# EAGLE board chassis (EAGLE 7.3.0)
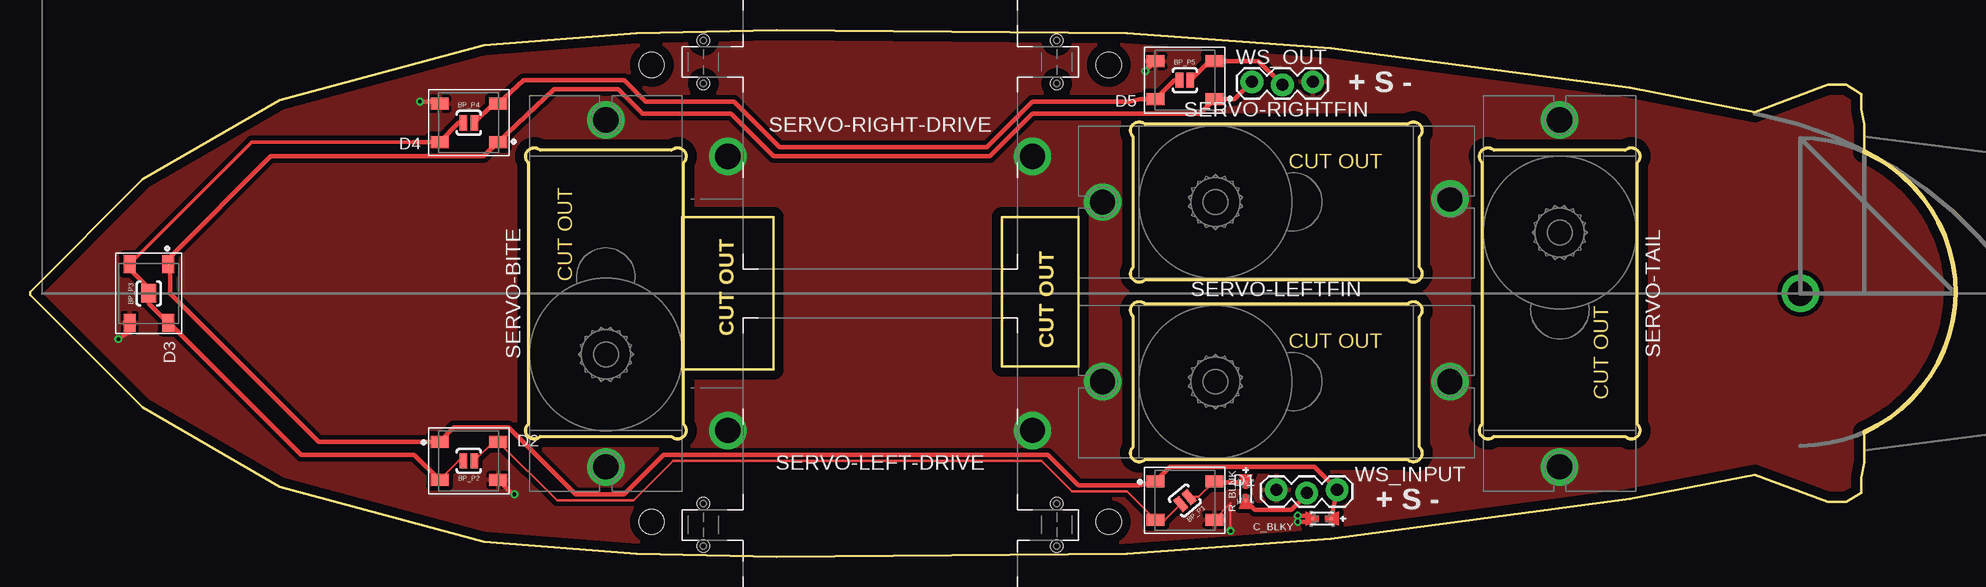
[diagram p0: board, top side]
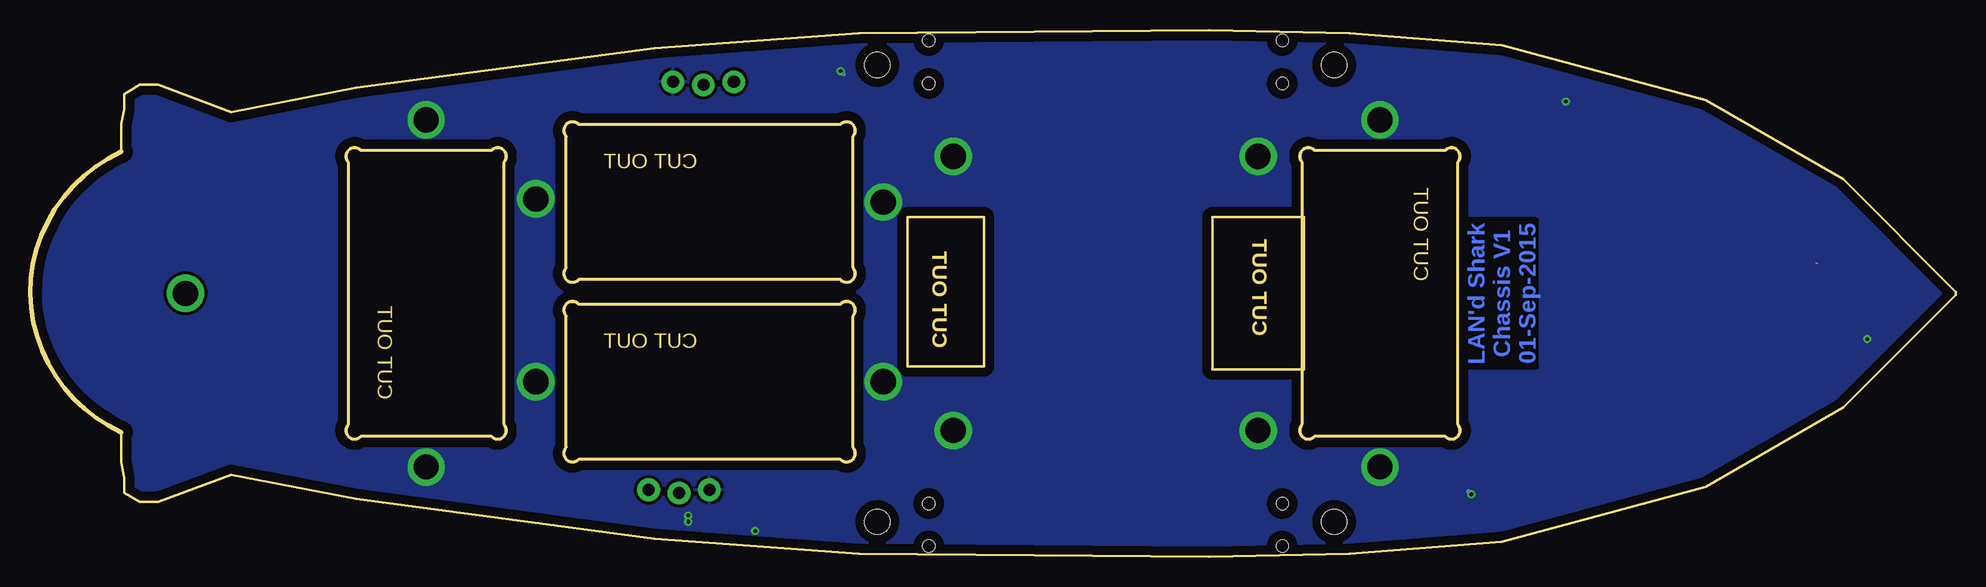
[diagram p1: board, bottom side, seen from below]

Size 160.53 x 43.94 mm. Coordinates in mm from the lower left corner, seen from the top.
Outline: 0,22.1 9.4,31.5 20.83,38.1 37.85,42.67 50.55,43.69 62.23,43.94 91.44,43.69 108.46,42.42 133.35,39.12 143.76,37.08 149.86,39.37 151.38,39.37 152.65,38.61 152.65,37.34 152.91,36.07 152.91,33.78 arc-65 160.53,21.97 arc-64 152.91,10.39 152.91,7.87 152.65,6.6 152.65,5.33 151.38,4.57 149.86,4.57 143.76,6.86 133.35,4.83 108.46,1.52 91.44,0.25 62.23,0 50.55,0.25 37.85,1.27 20.83,5.84 9.4,12.45 0,21.84 0,22.1
Outline: 54.36,15.62 54.36,28.32 61.98,28.32 61.98,15.62 54.36,15.62
Outline: 81.03,15.88 81.03,28.32 87.38,28.32 87.38,15.88 81.03,15.88
Copper layers (1*16): Top 0.0356mm / dielectric 1.5011mm / Bottom 0.0356mm
Design rules "LaenPCBOrder-tented *": minimum track width 6mil, minimum drill 13mil, track to track 6mil, track to pad 6mil, pad to pad 6mil, via to via 6mil, smd to smd 0mil, copper to edge 30mil, drill to drill 6mil, minimum pad ring 7mil, minimum via ring 7mil, stop-mask expansion 4mil, vias tented up to drill 25mil, thermal gap 10mil
Holes 2.1 mm at 51.82,41.02 89.92,41.02 89.92,2.92 51.82,2.92
Holes 1.02 mm at 56.13,0.89 85.6,0.89 85.6,4.44 56.13,4.44 56.13,39.5 56.13,43.05 85.6,39.5 85.6,43.05

## Footprints (pad centres in the part's own frame; a part is rotated, then mirrored left to right if it is on the bottom)
PAD-JUMPER-2-NO_YES_SILK = smd 0.635 x 1.27: 1 -0.45,0; 2 0.45,0
0402-0603-0805-UNIVERSAL = smd 0.254 x 0.254: + -0.762,0; - 0.762,0
WS2812B = smd 1.5 x 1: 1 -2.45,1.6; 2 -2.45,-1.6; 3 2.45,-1.6; 4 2.45,1.6
1X03_LOCK = drill 1.016 pad 1.88: 1 0,0.127; 2 2.54,-0.127; 3 5.08,0.127

## Placement (x,y rotation side)
BP_P1  [PAD-JUMPER-2-NO_YES_SILK]  96.27,4.7 220 top
BP_P2  [PAD-JUMPER-2-NO_YES_SILK]  36.58,8 180 top
BP_P3  [PAD-JUMPER-2-NO_YES_SILK]  9.91,21.97 90 top
BP_P4  [PAD-JUMPER-2-NO_YES_SILK]  36.58,36.2 0 top
BP_P5  [PAD-JUMPER-2-NO_YES_SILK]  96.27,39.75 0 top
C_BLKY  0.1uF  [0402-0603-0805-UNIVERSAL]  107.7,3.17 180 top
D1  [WS2812B]  96.27,4.7 0 top
D2  [WS2812B]  36.58,8 0 top
D3  [WS2812B]  9.91,21.97 270 top
D4  [WS2812B]  36.58,36.2 180 top
D5  [WS2812B]  96.27,39.75 180 top
R_BLNK  50  [0402-0603-0805-UNIVERSAL]  101.35,5.46 270 top
SERVO-BITE  [MICROSERVER-VERTICAL]  54.36,10.54 90 top
SERVO-LEFT-DRIVE  RIGHT-DRIVE-SERVO  [MICROSERVO-HORIZONTAL-FLIPPED]  82.3,19.94 180 top
SERVO-LEFTFIN  [MICROSERVER-VERTICAL]  92.46,8.26 0 top
SERVO-RIGHT-DRIVE  [MICROSERVO-HORIZONTAL]  59.44,24 0 top
SERVO-RIGHTFIN  [MICROSERVER-VERTICAL]  92.46,23.24 0 top
SERVO-TAIL  [MICROSERVER-VERTICAL]  121.16,33.4 270 top
WS_INPUT  [1X03_LOCK]  103.89,5.46 0 top
WS_OUT  [1X03_LOCK]  101.85,39.5 0 top

## Library data of the parts
BP_P1-BP_P5 = SparkFun-Passives
C_BLKY D1-D5 R_BLNK SERVO-BITE SERVO-LEFT-DRIVE SERVO-LEFTFIN SERVO-RIGHT-DRIVE SERVO-RIGHTFIN SERVO-TAIL = tekdemo
WS_INPUT WS_OUT = SparkFun-Connectors

## Nets
BLINKY: R_BLNK.- WS_INPUT.2
GND: C_BLKY.- D1.3 D2.3 D3.3 D4.3 D5.3 WS_INPUT.1 WS_OUT.3
N$3: BP_P1.2 BP_P2.1 D1.2 D2.4
N$4: BP_P4.2 BP_P5.1 D4.2 D5.4
N$6: BP_P5.2 D5.2 WS_OUT.2
N$10: BP_P1.1 D1.4 R_BLNK.+
N$11: BP_P2.2 BP_P3.1 D2.2 D3.4
N$12: BP_P3.2 BP_P4.1 D3.2 D4.4
VSUPPLY: C_BLKY.+ D1.1 D2.1 D3.1 D4.1 D5.1 WS_INPUT.3 WS_OUT.1

## Tracks (layer width: path | path; a pad name or v marks a point on that pad's centre or on a via)
BLINKY
  Top 0.381: R_BLNK.- 102.11,3.94 105.16,3.94 106.43,5.21 WS_INPUT.2
GND  (via drill 0.3, 2.1)
  Top 0.203: D1.3 100.06,4.44 v100.08,2.16
  Top 0.381: D3.3 8.13,18.68 v7.37,18.16 | D2.3 40.22,5.21 v40.39,5.21 | D4.3 33.95,37.97 v32.51,37.97 | D5.3 92.98,40.51 v92.96,40.51 | C_BLKY.- 106.68,2.92 v105.66,2.92 | v105.66,3.43 106.43,3.43 arc-90 106.68,3.17
  Bottom 0.381: v40.39,5.21 40.64,5.46 | v92.96,40.51 92.71,40.26
  other vias: 127.51,7.49 118.36,14.61 118.36,29.85 127.51,36.45 89.41,29.59 89.41,14.61 48.01,7.49 48.01,36.45 58.17,10.54 83.57,10.54 83.57,33.4 58.17,33.4
  pour Bottom (isolate 0.254, rank 2): 199.39,-0.89 0,-0.89 0,44.07 199.39,44.07
  pour Top (isolate 0.381): 0,-2.67 0,45.34 198.37,45.34 198.37,-2.67
N$1  (via drill 2.1)
  other vias: 147.57,21.97
N$3
  Top 0.203: BP_P1.2 94.61,3.1 D1.2 91.45,5.46 86.87,5.46 84.33,8 53.59,8 50.29,4.7 43.93,4.7 D2.4 38.63,9.6 BP_P2.1
N$4
  Top 0.381: BP_P4.2 38.63,37.79 D4.2 41.13,39.75 49.53,39.75 51.31,37.97 58.67,37.97 62.48,34.16 79.76,34.16 83.57,37.97 91.69,37.97 92.53,38.15 D5.4 95.42,39.75 BP_P5.1
N$6
  Top 0.381: BP_P5.2 98.32,41.35 D5.2 102.41,41.35 WS_OUT.2
N$10
  Top 0.203: 98.72,6.31 D1.4 97.41,4.99 BP_P1.1
  Top 0.381: R_BLNK.+ 98.79,6.22 D1.4
N$11
  Top 0.203: BP_P2.2 35.73,8 D2.2
  Top 0.381: D2.2 32.02,8.51 22.61,8.51 11.59,19.52 D3.4 9.91,21.12 BP_P3.1
N$12
  Top 0.305: 31.93,34.59 18.48,34.59 D3.2
  Top 0.381: BP_P3.2 8.31,24.02 D3.2 | 31.93,34.59 D4.4 35.73,36.2 BP_P4.1
VSUPPLY  (1 unrouted)
  Top 0.381: 11.68,24.51 11.68,25.02 20.07,33.4 37.83,33.4 D4.1 43.67,38.99 49.02,38.99 51.05,36.96 58.42,36.96 61.98,33.4 80.01,33.4 83.57,36.96 97.52,36.96 D5.1 100.38,38.15 WS_OUT.1 | C_BLKY.+ WS_INPUT.3 107.06,7.49 95.01,7.49 D1.1 92.47,5.97 87.38,5.97 84.84,8.51 52.83,8.51 49.53,5.21 45.47,5.21 39.88,10.79 35.32,10.79 D2.1 24.05,9.6 11.68,21.97 11.68,24.24 D3.1

## Text on the board
Bottom: LAN'd Shark / Chassis V1 / 01-Sep-2015
Dimension: CUT OUT | CUT OUT
tPlace: + S - | + S -
bStop: LAN'd Shark / Chassis V1 / 01-Sep-2015